# Altium PCB MICmuter_v2.PcbDoc
Units mm, origin at the board's own origin, x right, y up, seen from the top; angles counter-clockwise.
Board outline 87 x 35 mm, 2 copper layers (Top Layer, Bottom Layer); 39 components, 27 nets, 106 pads, 4 vias.
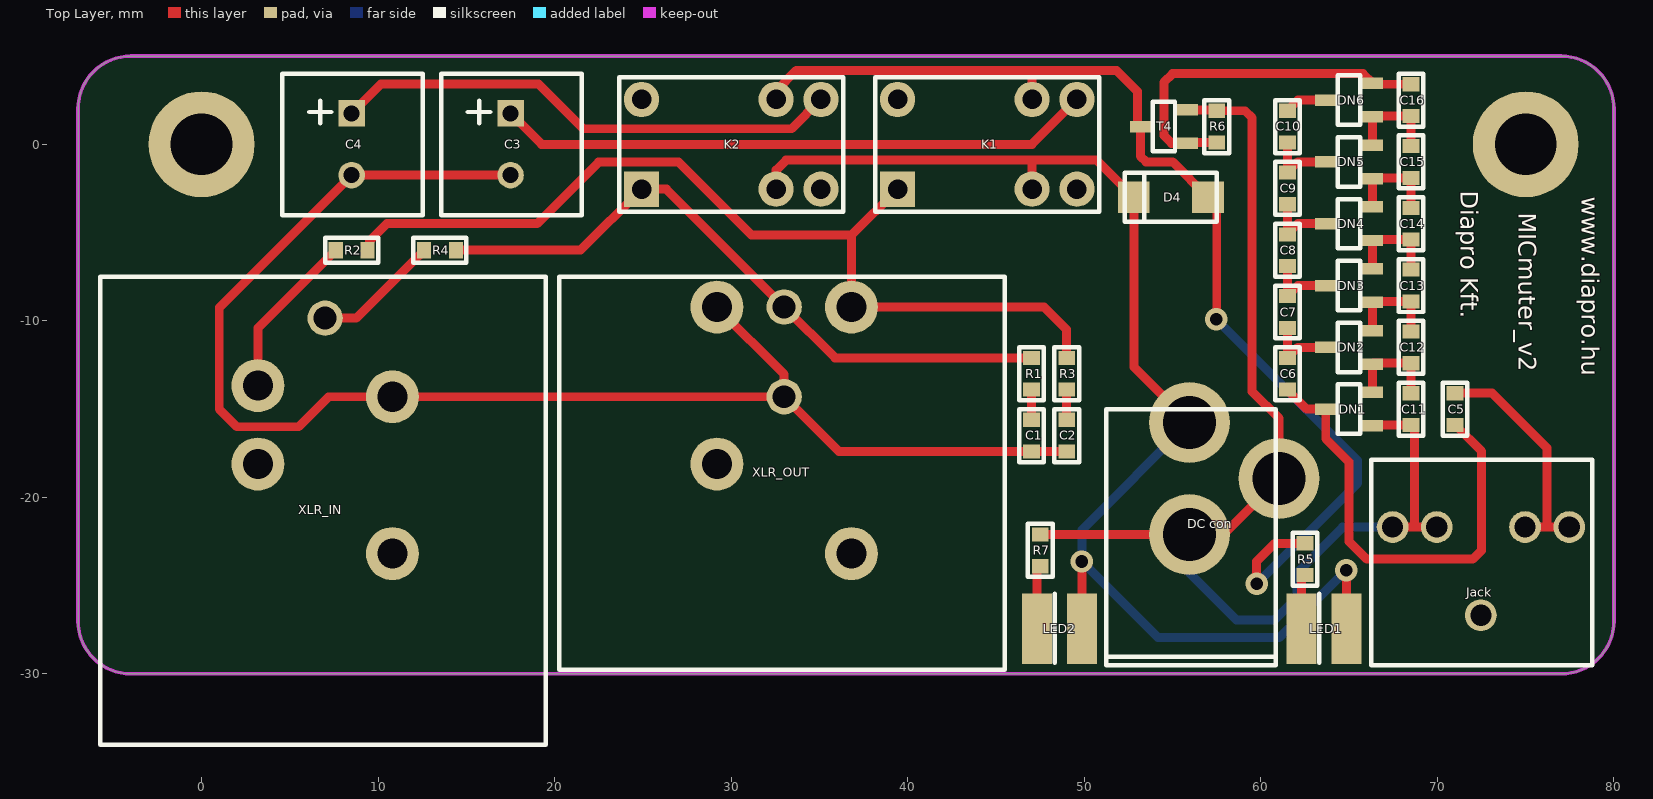
[diagram p0: Top Layer view]
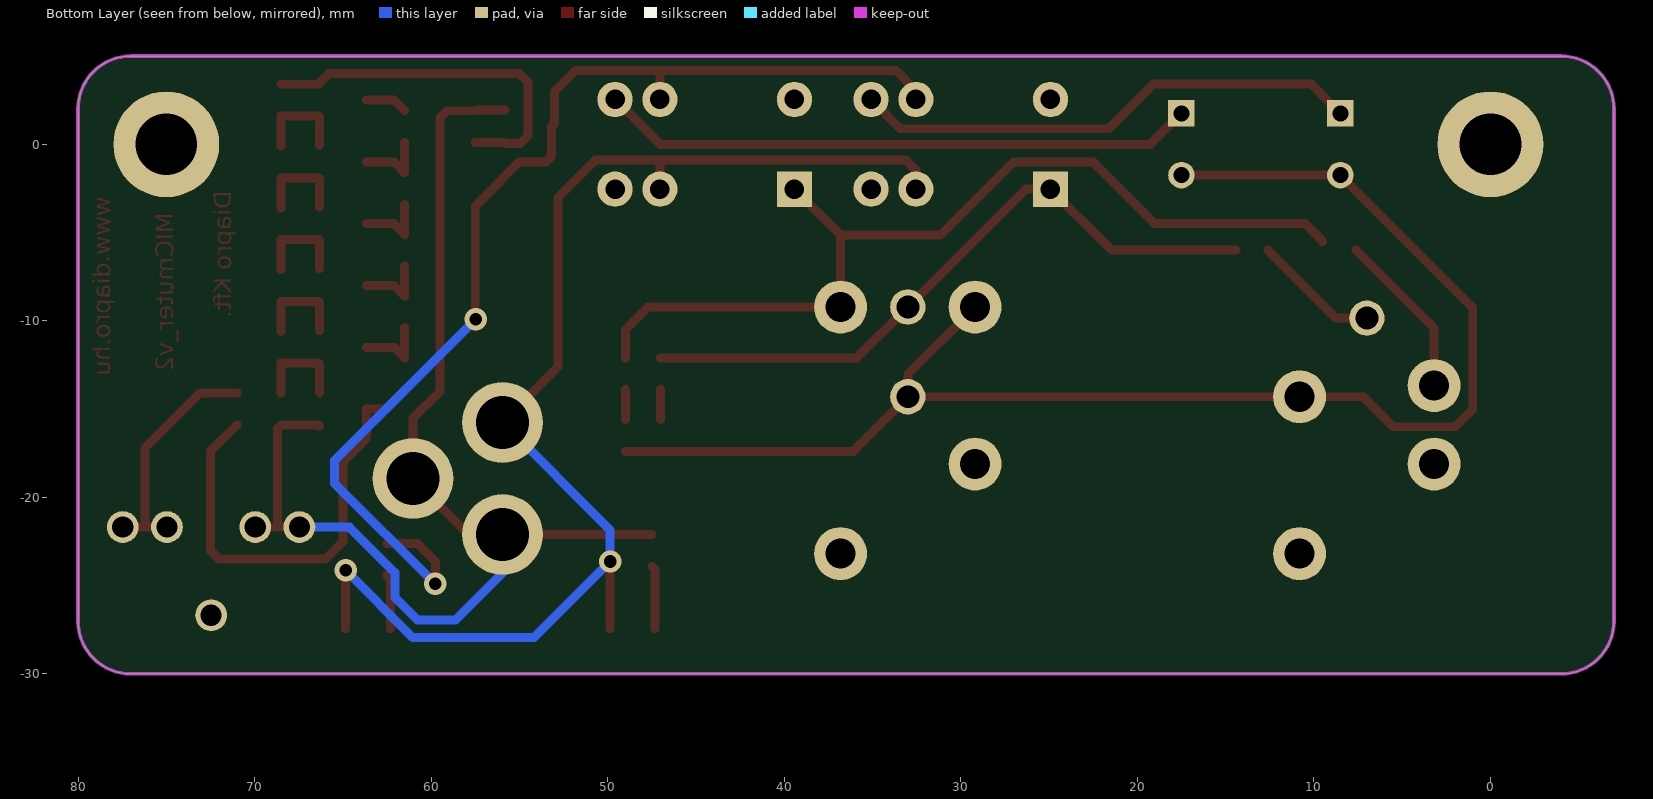
[diagram p1: Bottom Layer view, seen from below]
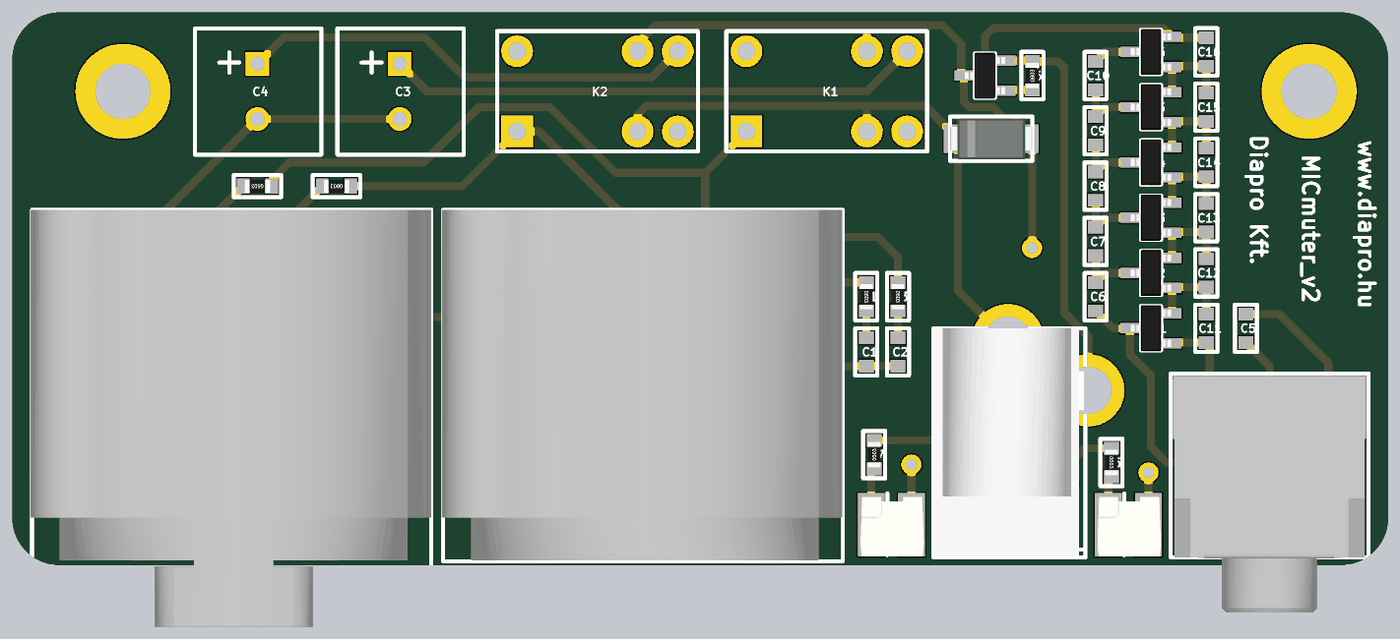
[diagram p2: 3D render of the assembled board from above, using the file's embedded part models]

## Layer stack, top to bottom
Top Layer: signal copper 0.0356
Dielectric: dielectric 0.32, FR-4, Dk 4.8
Bottom Layer: signal copper 0.0356

## Board outline
-7,-27 -7,2 cw(c-4,2) -4,5 77,5 cw(c77,2) 80,2 80,-27 cw(c77,-27) 77,-30 -4,-30 cw(c-4,-27)

## Design rules (kind name [scope] priority, off if disabled: settings)
Clearance [All] p1: gap=0.254
PolygonConnect [All] p1: connectstyle=Relief reliefconductorwidth=0.254 reliefentries=4 polygonreliefangle="90 Angle"
RoutingVias [All] p1: holewidth=0.711 width=1.27 viastyle="Through Hole" minholewidth=0.711 minwidth=1.27 maxholewidth=0.711 maxwidth=1.27
SilkscreenOverComponentPads [All] p1: minsilkscreentomaskgap=0.254
SolderMaskExpansion [All] p1: expansion=0.102
Width [All] p1: maxlimit=1.27 minlimit=0.254 preferedwidth=0.254
27 further rules are at their usual default settings.

## Components (designator, comment, footprint, x,y, rotation, side; value= is the part's Value field where it differs from the comment)
C1 "100nF" FP_0603_CAP_080 47,-16.5 r90 top
C2 "100nF" FP_0603_CAP_080 49,-16.5 r90 top
C3 "1000uF" CAP_8x11_allo 17.5,0 r0 top
C4 "1000uF" CAP_8x11_allo 8.5,0 r0 top
C5 "100nF" FP_0603_CAP_080 71,-15 r90 top
C6 "100nF" FP_0603_CAP_080 61.5,-13 r270 top
C7 "100nF" FP_0603_CAP_080 61.5,-9.5 r270 top
C8 "100nF" FP_0603_CAP_080 61.5,-6 r270 top
C9 "100nF" FP_0603_CAP_080 61.5,-2.5 r270 top
C10 "100nF" FP_0603_CAP_080 61.5,1 r270 top
C11 "100nF" FP_0603_CAP_080 68.5,-15 r270 top
C12 "100nF" FP_0603_CAP_080 68.5,-11.5 r270 top
C13 "100nF" FP_0603_CAP_080 68.5,-8 r270 top
C14 "100nF" FP_0603_CAP_080 68.5,-4.5 r270 top
C15 "100nF" FP_0603_CAP_080 68.5,-1 r270 top
C16 "100nF" FP_0603_CAP_080 68.5,2.5 r270 top
D4 "DIODE_big" "FP_SMA DO214AC" 57,-3 r180 top
"DC con" "2.xmm" FP_DC_TAP_ANYA 55.951,-15.757 r180 top locked
DN1 "BAR43S" DIODE_SOT23_serial 65,-15 r0 top
DN2 "BAR43S" DIODE_SOT23_serial 65,-11.5 r0 top
DN3 "BAR43S" DIODE_SOT23_serial 65,-8 r0 top
DN4 "BAR43S" DIODE_SOT23_serial 65,-4.5 r0 top
DN5 "BAR43S" DIODE_SOT23_serial 65,-1 r0 top
DN6 "BAR43S" DIODE_SOT23_serial 65,2.5 r0 top
Jack "Stereo_Jack" STEREO_JACK 72.461,-26.679 r90 top locked
K1 "Relay_Song Chuan" "Relay_Song Chuan" 44.5,0 r90 top
K2 "Relay_Song Chuan" "Relay_Song Chuan" 30,0 r90 top (schematic designator K1)
LED1 "LED_RED" "Osram sideled" 63.571,-27.441 r0 top locked
LED2 "LED_RED" "Osram sideled" 48.585,-27.441 r0 top locked
R1 "?" FP_0603_RES 47,-13 r270 top
R2 "?" FP_0603_RES 8.5,-6 r180 top
R3 "?" FP_0603_RES 49,-13 r270 top
R4 "?" FP_0603_RES 13.5,-6 r180 top
R5 "?" FP_0603_RES 62.5,-23.5 r270 top
R6 "?" FP_0603_RES 57.5,1 r90 top
R7 "?" FP_0603_RES 47.5,-23 r90 top
T4 "SI2306" FET_SOT23 54.5,1 r0 top
XLR_IN "NEUTRIK_NC3FAH1" NEUTRIK_NC3FAH1 7,-27 r0 top locked
XLR_OUT "NEUTRIK_NC3MAH" NEUTRIK_NC3MAH 33,-27 r0 top locked

## Footprints (in the part's own frame and the unit in brackets; to place one, negate y for a bottom-side part, rotate by r counter-clockwise, add the part's x,y. Pads: shape width x height; smd on the part's side, far side on the other; paste and mask are expansions set on the pad)
CAP_8x11_allo [mm]
  round 1.5 hole 0.9: N(0,-1.75)
  rect 1.5x1.5 hole 0.9: P(0,1.75)
  silkscreen extent -3.94,-4.01 4.04,3.99, body extent -3.99,-4 3.99,3.97, height 11
DIODE_SOT23_serial [mm] "SOT23-3 tok"
  rect 1.2x0.65 smd: A(1.327,-0.95) COM(-1.327,0) K(1.327,0.95)
  silkscreen extent -0.64,-1.4 0.64,1.4, body extent -1.27,-1.46 1.27,1.46, height 0.97
FET_SOT23 [mm] "SOT23-3 tok"
  rect 1.2x0.65 smd: D(-1.327,0) G(1.327,-0.95) S(1.327,0.95)
  silkscreen extent -0.64,-1.4 0.64,1.4, body extent -1.27,-1.46 1.27,1.46, height 0.97
FP_0603_CAP_080 [mm] "0.8mm magas 0603 kapacitás"
  rect 0.8x0.95 smd: 1(-0.9,0) 2(0.9,0)
  silkscreen extent -1.5,-0.7 1.5,0.7, body extent -0.8,-0.4 0.76,0.4, height 0.8
FP_0603_RES [mm] "0603 ellenállás"
  rect 0.8x0.95 smd: 1(-0.9,0) 2(0.9,0)
  silkscreen extent -1.5,-0.7 1.5,0.7, body extent -0.8,-0.4 0.8,0.4, height 0.44
FP_DC_TAP_ANYA [mil] "DC HEBA25 TÁPFESZÜLTSÉG ALJZAT ZÁRT, NYÁKBA 90°"
  round 180 hole 118: 1(0,0) 2(0,250) 3(-200,125)
  silkscreen extent -193,-30 185,541, body extent -190,-31 183,539, height 440
"FP_SMA DO214AC" [mm] "SMA DO-214AC tok"
  rect 1.8x1.8 smd: A(0,0) K(4.2,0)
  silkscreen extent -0.5,-1.4 4.7,1.4, body extent -0.5,-1.3 4.7,1.3, height 2.42
NEUTRIK_NC3FAH1 [mm]
  round 3 hole 1.7: 0(-3.81,8.89) 0(3.81,3.81) 1+G(3.81,12.7) 2(-3.81,13.335)
  round 2 hole 1.3: 3(0,17.15)
  silkscreen extent -12.75,-7 12.5,19.5, body extent -12.85,-6.9 12.5,19.5, height 29.57
NEUTRIK_NC3MAH [mm]
  round 3 hole 1.7: 0(-3.81,8.89) 0(3.81,3.81) 1(-3.81,17.78) 2(3.81,17.78)
  round 2 hole 1.3: 3(0,17.78) G(0,12.7)
  silkscreen extent -12.75,-2.75 12.5,19.5, body extent -12.85,-2.7 12.5,19.5, height 25.45
"Osram sideled" [mm]
  rect 1.702x4 smd paste+0: A(1.27,0)
  rect 1.702x4 smd: K(-1.27,0)
  silkscreen extent -0.25,-1.93 -0.25,1.98, body extent -1.95,-2.01 2.05,1.75, height 4.03
"Relay_Song Chuan" [mm]
  round 2 hole 1.1: COIL1(-2.54,-2.54) COIL2(2.54,-2.54) COM2(2.54,5.08) NC(-2.54,-5.08) NO(2.54,-5.08)
  rect 2x2 hole 1.1: COM1(-2.54,5.08)
  silkscreen extent -3.81,-6.35 3.81,6.35, body extent -3.8,-6.3 3.8,6.3, height 10
STEREO_JACK [mm] "JACK 3.5mm ANYA 90° JS35-09 (T-T) LEVÁL. NYÁK SZTEREO 90° A-V [43-08-39]"
  round 1.8 hole 1.2: 1(0,0) 2(5,2.5) 2(5,5) 3(5,-5) 3(5,-2.5)
  silkscreen extent -2.82,-6.3 8.81,6.22, body extent -6.33,-6.13 8.67,6.07, height 11.5

## Part data
C1 C2 C5 C6 C7 C8 C9 C10 C11 C12 C13 C14 C15 C16: library part CAP, "Capacitor"
C3 C4: library part CAP_ELECT, "Polarized Capacitor"
"DC con": library part DC_TAP_ANYA, "2.xmm DC HEBA25 TÁPFESZÜLTSÉG ALJZAT ZÁRT, NYÁKBA 90°"
K1 K2: "SPDT Relay"
LED1 LED2: library part LED_R, "Typical LED"
R1 R2 R3 R4 R5 R6 R7: library part Res3, "Resistor"
T4: library part NMOS

## Free pads (board coordinates)
  round 6 hole 3.5: 0(0,0) 0(75,0)

## Via types
v1: diameter 1.27, hole 0.711, Top Layer to Bottom Layer, 4 vias

## Nets (pads, with @x,y where several pads share a name; then routed paths per layer and width w, separated by ;. In a path a pad name is that pad's centre, name@x,y a point inside that pad or via, vN(x,y) a via of type N, cw(c..) or ccw(c..) an arc to the next point about the centre after c; other vN are vias at no path point)
5V: "DC con.1" D4.K K1.COIL1 K2.COIL1 LED1.A LED2.A | length 74
  Top Layer w0.508: K2.COIL1 32.54,-1.46 33.102,-0.898 50.698,-0.898 D4.K 52.8,-12.606 55.951,-15.757 ; K1.COIL1 47.04,-0.898 ; LED2.A v1(49.855,-23.631) ; LED1.A v1(64.841,-24.139)
  Bottom Layer w0.508: 55.951,-15.757 49.855,-21.853 v1(49.855,-23.631) 54.173,-27.949 61.031,-27.949 v1(64.841,-24.139)
GND: "DC con.2" "DC con.3" C11.2 DN1.A Jack.2 R6.2 R7.2 T4.S | length 68.1
  Top Layer w0.508: R7.2 55.944,-22.1 55.951,-22.107 57.856,-22.107 61.031,-18.932 61.031,-15.531 59.508,-14.008 59.508,1.492 59.1,1.9 R6.2 57.45,1.95 T4.S ; DN1.A 66.377,-15.9 C11.2 68.711,-16.111 68.711,-21.679 ; Jack.2@67.461,-21.679 68.711,-21.679 ; Jack.2@69.961,-21.679 68.711,-21.679
  Bottom Layer w0.508: 55.951,-22.107 55.951,-24.266 58.618,-26.933 60.777,-26.933 62.047,-25.663 62.047,-24.266 64.634,-21.679 Jack.2@67.461,-21.679
"MIC GND": C1.1 C2.1 C3.N C4.N XLR_IN.1+G XLR_OUT.1 XLR_OUT.G | length 82.4
  Top Layer w0.508: C3.N C4.N 1,-9.25 1,-15 2,-16 5.5,-16 7.2,-14.3 XLR_IN.1+G XLR_OUT.G ; XLR_OUT.1 33,-13.03 XLR_OUT.G ; C2.1 C1.1 36.1,-17.4 XLR_OUT.G
MIC+: K1.COM1 R2.1 R3.1 XLR_OUT.2 | length 53
  Top Layer w0.508: 9.5,-5.5 10.5,-4.5 19,-4.5 22.492,-1.008 22.71,-1.008 22.718,-1 27,-1 31.15,-5.15 36.81,-5.15 ; K1.COM1 36.81,-5.15 ; R3.1 49,-10.5 47.72,-9.22 XLR_OUT.2 36.81,-5.15
MIC-: K2.COM1 R1.1 R4.1 XLR_OUT.3 | length 38
  Top Layer w0.508: R4.1 21.46,-6 K2.COM1 26.32,-2.54 XLR_OUT.3 35.88,-12.1 R1.1
NetC1_2: C1.2 R1.2 | length 1.7
  Top Layer w0.508: C1.2 R1.2
NetC2_2: C2.2 R3.2 | length 1.7
  Top Layer w0.508: C2.2 R3.2
NetC3_P: C3.P K1.NO | length 33.9
  Top Layer w0.508: C3.P 19.259,-0.009 47.031,-0.009 K1.NO
NetC4_P: C4.P K2.NO | length 29
  Top Layer w0.508: C4.P 10.17,3.42 19.08,3.42 21.62,0.88 33.42,0.88 K2.NO
NetC5_1: C5.1 C6.2 DN1.COM | length 26.5
  Top Layer w0.508: C6.2 62.6,-15 DN1.COM 63.673,-16.673 65,-18 65,-22.5 66,-23.5 72,-23.5 72.5,-23 72.5,-17.4 C5.1
NetC5_2: C5.2 Jack.3 | length 13.5
  Top Layer w0.508: C5.2 73.1,-14.1 76.211,-17.211 76.211,-21.679 ; Jack.3@74.961,-21.679 76.211,-21.679 ; Jack.3@77.461,-21.679 76.211,-21.679
NetC6_1: C6.1 C7.2 DN2.COM | length 4.1
  Top Layer w0.508: C7.2 C6.1 62.1,-11.5 DN2.COM
NetC7_1: C7.1 C8.2 DN3.COM | length 4.1
  Top Layer w0.508: C8.2 C7.1 62.1,-8 DN3.COM
NetC8_1: C8.1 C9.2 DN4.COM | length 4.1
  Top Layer w0.508: C9.2 C8.1 62.1,-4.5 DN4.COM
NetC9_1: C9.1 C10.2 DN5.COM | length 4.1
  Top Layer w0.508: C10.2 C9.1 62.1,-1 DN5.COM
NetC10_1: C10.1 DN6.COM | length 2.4
  Top Layer w0.508: C10.1 62.1,2.5 DN6.COM
NetC11_1: C11.1 C12.2 DN1.K DN2.A | length 5.5
  Top Layer w0.508: DN1.K DN2.A 66.377,-12.4 C12.2 C11.1
NetC12_1: C12.1 C13.2 DN2.K DN3.A | length 5.5
  Top Layer w0.508: DN2.K DN3.A 66.377,-8.9 C13.2 C12.1
NetC13_1: C13.1 C14.2 DN3.K DN4.A | length 5.5
  Top Layer w0.508: DN3.K DN4.A 66.377,-5.4 C14.2 C13.1
NetC14_1: C14.1 C15.2 DN4.K DN5.A | length 5.5
  Top Layer w0.508: DN4.K DN5.A 66.377,-1.9 C15.2 C14.1
NetC15_1: C15.1 C16.2 DN5.K DN6.A | length 5.5
  Top Layer w0.508: DN5.K DN6.A 66.377,1.6 C16.2 C15.1
NetD4_A: D4.A K1.COIL2 K2.COIL2 R5.1 T4.D | length 64.3
  Top Layer w0.508: K2.COIL2 32.54,3.04 33.682,4.182 47.04,4.182 ; K1.COIL2 47.04,4.182 ; v1@57.5,-9.915 57.5,-3.5 D4.A 55,-1 53.5,-1 53.173,-0.673 T4.D 53,1.173 53,3 51.818,4.182 47.04,4.182 ; v1(59.761,-24.901) 59.761,-23.631 60.792,-22.6 R5.1
  Bottom Layer w0.508: v1(57.475,-9.915) 65.476,-17.916 65.476,-19.186 v1(59.761,-24.901)
NetLED1_K: LED1.K R5.2 | length 3.1
  Top Layer w0.508: LED1.K 62.301,-24.599 R5.2
NetLED2_K: LED2.K R7.1 | length 3.6
  Top Layer w0.508: LED2.K 47.315,-24.085 R7.1
NetR2_2: R2.2 XLR_IN.2 | length 9.5
  Top Layer w0.508: XLR_IN.2 3.19,-10.41 R2.2
NetR4_2: R4.2 XLR_IN.3 | length 7.2
  Top Layer w0.508: XLR_IN.3 8.75,-9.85 R4.2
SIGNAL: C16.1 DN6.K R6.1 T4.G | length 20.7
  Top Layer w0.508: R6.1 55.877,0.1 T4.G 54.95,0.05 54.5,0.5 54.5,3.5 55,4 65.777,4 DN6.K 66.377,3.4 C16.1
pads on no net: Jack.1 K1.COM2 K1.NC K2.COM2 K2.NC XLR_IN.0 XLR_OUT.0

## Keep-outs
Keep-Out Layer:
  the board outline again, w0.2

## Other copper
Top Layer:
  text "Diapro Kft." at 71.332,-2.641 h1 r270
  text "www.diapro.hu" at 78.167,-2.98 h1 r270
  text "MICmuter_v2" at 74.611,-3.869 h1 r270

## Silkscreen, mask and mechanical layers (free items; w line width, h text height)
Top Overlay:
  text "Diapro Kft." at 71.332,-2.641 h1 r270
  text "www.diapro.hu" at 78.167,-2.98 h1 r270
  text "MICmuter_v2" at 74.611,-3.869 h1 r270
Top Solder:
  text "Diapro Kft." at 71.332,-2.641 h1 r270
  text "www.diapro.hu" at 78.167,-2.98 h1 r270
  text "MICmuter_v2" at 74.611,-3.869 h1 r270